# EAGLE board power electronics7 (EAGLE 9.2.2)
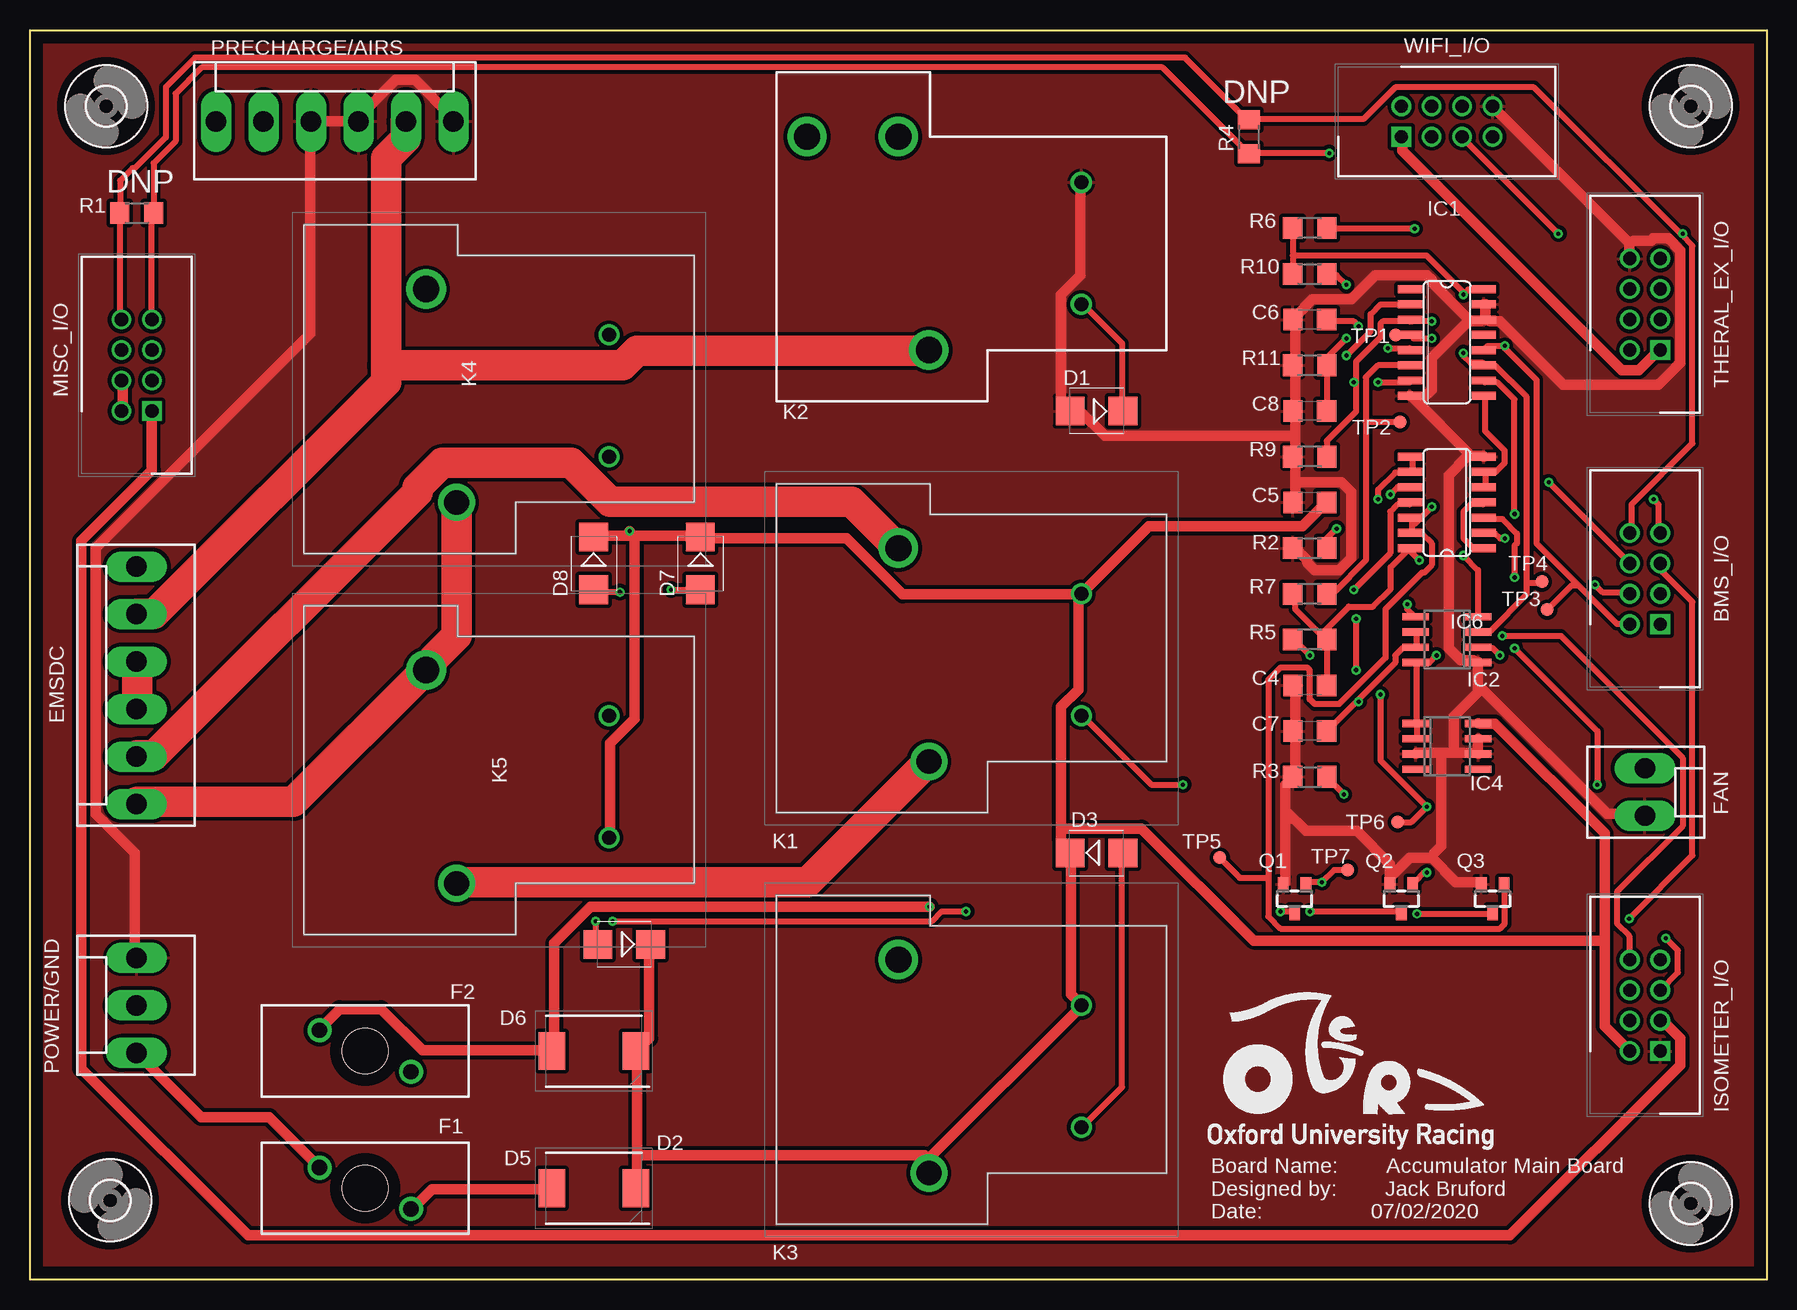
[diagram p0: board, top side]
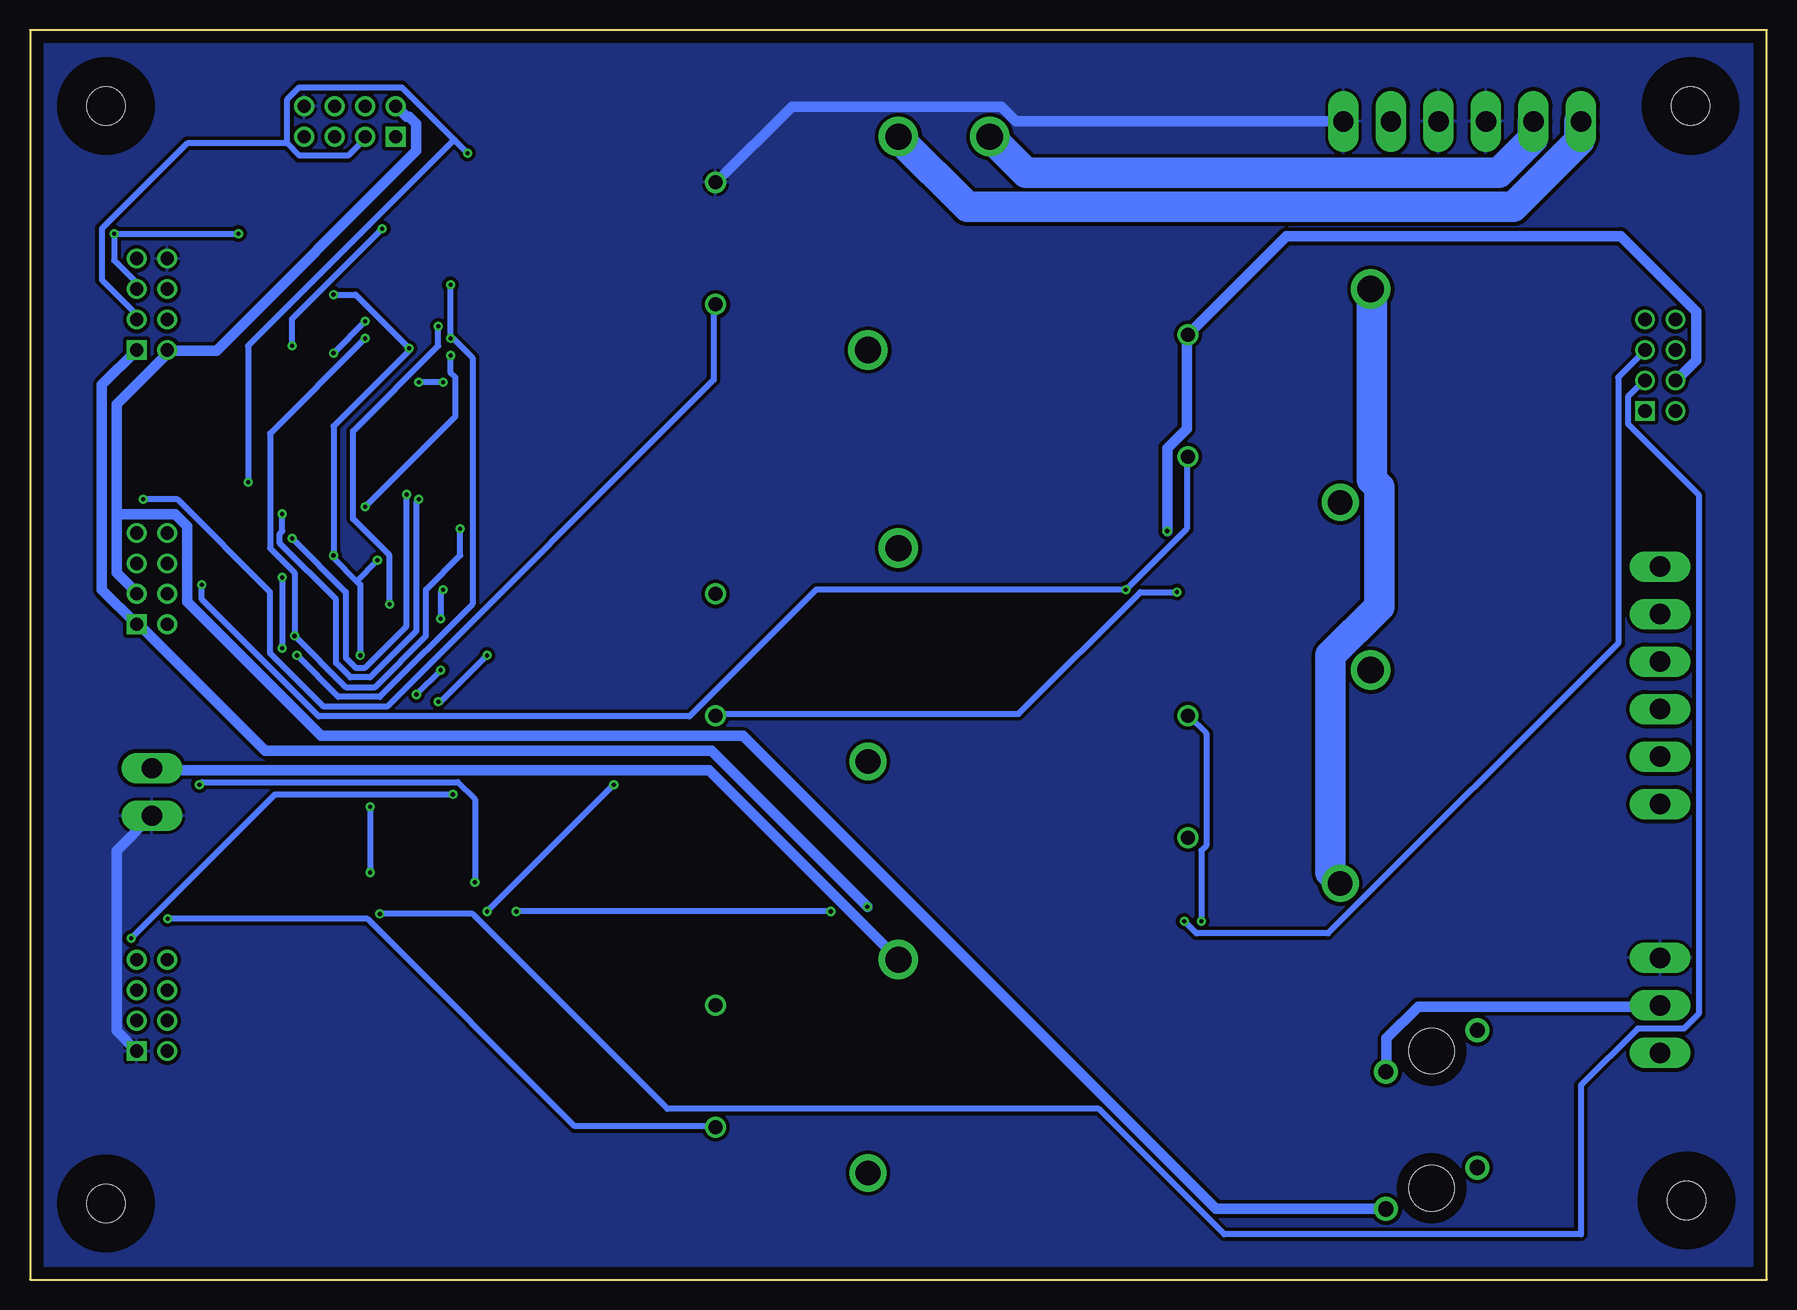
[diagram p1: board, bottom side, seen from below]

Size 144.78 x 104.14 mm. Coordinates in mm from the lower left corner, seen from the top.
Outline: 0,0 0,104.14 144.78,104.14 144.78,0 0,0
Copper layers (1*16): Top 0.035mm / dielectric 1.5mm / Bottom 0.035mm
Design rules "default *": minimum track width 6mil, minimum drill 0.35mm, track to track 12mil, track to pad 12mil, pad to pad 12mil, via to via 12mil, smd to smd 0mil, copper to edge 40mil, drill to drill 6mil, minimum pad ring 10mil, minimum via ring 8mil, stop-mask expansion 4mil, vias tented up to drill 0mil, thermal gap 10mil
Net classes: 0 default: width 0.508 mm; 1 GND: width 0.889 mm; 2 EMSDC: width 2.54 mm; 3 power: width 0.889 mm

## Footprints (pad centres in the part's own frame; a part is rotated, then mirrored left to right if it is on the bottom)
HDRV8W64P254_2X4_1778X895X915P = drill 1.1 pad 1.65 square: 1 0,0 | drill 1.1 pad 1.65: 2 0,2.54; 3 2.54,0; 4 2.54,2.54; 5 5.08,0; 6 5.08,2.54; 7 7.62,0; 8 7.62,2.54
C1206 = smd 1.6 x 1.8: 1 -1.4,0; 2 1.4,0
SMB = smd 2.4 x 2.4: A 2.2,0; C -2.2,0
DIOM7959X262N = smd 2.2 x 3.15: 1 -3.5,0; 2 3.5,0
KK-156-6 = drill 1.7 pad 2.184 long: 1 -9.9,0; 2 -5.94,0; 3 -1.98,0; 4 1.98,0; 5 5.94,0; 6 9.9,0
01530008 = drill 1.27 pad 2: 1 1.727,3.81; 2 -1.727,-3.81 | hole 3.785: 0,0
KK-156-2 = drill 1.7 pad 2.184 long: 1 -1.98,0; 2 1.98,0
3,2 = hole 3.2: 0,0
SO16 = smd 0.66 x 2.032: 1 -4.445,-3.073; 2 -3.175,-3.073; 3 -1.905,-3.073; 4 -0.635,-3.073; 5 0.635,-3.073; 6 1.905,-3.073; 7 3.175,-3.073; 8 4.445,-3.073; 9 4.445,3.073; 10 3.175,3.073; 11 1.905,3.073; 12 0.635,3.073; 13 -0.635,3.073; 14 -1.905,3.073; 15 -3.175,3.073; 16 -4.445,3.073
SO08 = smd 0.6 x 2.2: 1 -1.905,-2.6; 2 -0.635,-2.6; 3 0.635,-2.6; 4 1.905,-2.6; 5 1.905,2.6; 6 0.635,2.6; 7 -0.635,2.6; 8 -1.905,2.6
SOIC8 = smd 0.6 x 2.2: 1 -1.905,-2.6; 2 -0.635,-2.6; 3 0.635,-2.6; 4 1.905,-2.6; 5 1.905,2.6; 6 0.635,2.6; 7 -0.635,2.6; 8 -1.905,2.6
SO14 = smd 0.66 x 2.032: 1 -3.81,-3.073; 2 -2.54,-3.073; 3 -1.27,-3.073; 4 0,-3.073; 5 1.27,-3.073; 6 2.54,-3.073; 7 3.81,-3.073; 8 3.81,3.073; 9 2.54,3.073; 10 1.27,3.073; 11 0,3.073; 12 -1.27,3.073; 13 -2.54,3.073; 14 -3.81,3.073
T9AS1D1248T9A = drill 1.17 pad 1.755: 1 0,0; 2 -10.16,0 | drill 2.06 pad 3.09: 3 -13.97,12.7 | drill 2.19 pad 3.3: 4 3.81,15.24
T9AS1D12 = drill 2.19 pad 3.29: 1 -8.89,12.7; 2 8.89,15.24; 3 8.89,22.86 | drill 1.17 pad 1.77: 4 -5.08,0; 5 5.08,0
KK-156-3 = drill 1.7 pad 2.184 long: 1 -3.96,0; 2 0,0; 3 3.96,0
SOT23 = smd 0.9 x 1.2: 1 -0.95,-1.2; 2 0.95,-1.2; 3 0,1.2
R1206 = smd 1.6 x 1.803: 1 -1.422,0; 2 1.422,0
TP11R = smd 1.1 x 1.1: TP 0,0
TP17R = smd 1.7 x 1.7: TP 0,0

## Placement (x,y rotation side)
BMS_I/O  T821108A1S100CEU  [HDRV8W64P254_2X4_1778X895X915P]  135.89,54.61 90 top
C4  3.3uF  [C1206]  106.68,49.53 180 top
C5  1uF  [C1206]  106.68,64.77 180 top
C6  0.1uF  [C1206]  106.68,80.01 180 top
C7  220uF  [C1206]  106.68,45.72 180 top
C8  50uF  [C1206]  106.68,72.39 180 top
D1  ES2D  [SMB]  88.9,72.39 180 top
D2  VS-30BQ100-M3_9AT  [DIOM7959X262N]  46.99,19.05 180 top
D3  ES2D  [SMB]  88.9,35.56 0 top
D5  VS-30BQ100-M3_9AT  [DIOM7959X262N]  46.99,7.62 180 top
D6  ES2D  [SMB]  49.53,27.94 180 top
D7  ES2D  [SMB]  55.88,59.69 270 top
D8  ES2D  [SMB]  46.99,59.69 270 top
EMSDC  [KK-156-6]  8.89,49.53 90 top
F1  01530008Z  [01530008]  27.94,7.62 270 top
F2  01530008Z  [01530008]  27.94,19.05 90 top
FAN  [KK-156-2]  134.62,40.64 270 top
H1  MOUNT-HOLE3.2  [3,2]  138.43,6.35 0 top
H2  MOUNT-HOLE3.2  [3,2]  138.43,97.79 0 top
H3  MOUNT-HOLE3.2  [3,2]  6.68,6.6 90 top
H4  MOUNT-HOLE3.2  [3,2]  6.35,97.79 0 top
IC1  4043D  [SO16]  118.11,78.11 270 top
IC2  SE555D  [SO08]  118.11,53.34 90 top
IC4  [SOIC8]  118.11,44.45 270 top
IC6  4011D  [SO14]  118.11,64.77 90 top
ISOMETER_I/O  T821108A1S100CEU  [HDRV8W64P254_2X4_1778X895X915P]  135.89,19.05 90 top
K1  T9AS1D12-48=T9A  [T9AS1D1248T9A]  87.63,57.15 90 top
K2  T9AS5D12-12=T9A  [T9AS1D12]  87.63,86.36 90 top
K3  T9AS1D12-48=T9A  [T9AS1D1248T9A]  87.63,22.86 90 top
K4  T9AS1D12-48=T9A  [T9AS1D1248T9A]  48.26,78.74 90 top
K5  T9AS1D12-48=T9A  [T9AS1D1248T9A]  48.26,46.99 90 top
MISC_I/O  T821108A1S100CEU  [HDRV8W64P254_2X4_1778X895X915P]  10.16,72.39 90 top
POWER/GND  [KK-156-3]  8.89,22.86 90 top
PRECHARGE/AIRS  [KK-156-6]  25.4,96.52 0 top
Q1  BSS138  [SOT23]  105.41,31.75 180 top
Q2  BSS138  [SOT23]  114.3,31.75 180 top
Q3  BSS138  [SOT23]  121.92,31.75 180 top
R1  120  [R1206]  8.89,88.9 180 top
R2  2.2K  [R1206]  106.68,60.96 180 top
R3  2.2K  [R1206]  106.68,41.91 180 top
R4  120  [R1206]  101.6,95.25 90 top
R5  10K  [R1206]  106.68,53.34 0 top
R6  2.2K  [R1206]  106.68,87.63 0 top
R7  2.2K  [R1206]  106.68,57.15 0 top
R9  10K  [R1206]  106.68,68.58 0 top
R10  50K  [R1206]  106.68,83.82 180 top
R11  500K  [R1206]  106.68,76.2 0 top
THERAL_EX_I/O  T821108A1S100CEU  [HDRV8W64P254_2X4_1778X895X915P]  135.89,77.47 90 top
TP1  TPSTP11R  [TP11R]  113.84,78.73 0 top
TP2  TPSTP11R  [TP11R]  114.2,71.46 0 top
TP3  TPSTP11R  [TP11R]  126.47,55.84 0 top
TP4  TPSTP11R  [TP11R]  126.03,58.18 0 top
TP5  TPSTP11R  [TP11R]  99.17,35.17 0 top
TP6  TPSTP11R  [TP11R]  114.01,38.14 0 top
TP7  TPSTP11R  [TP11R]  109.84,34.16 0 top
TP8  TPSTP17R  [TP17R]  1.3,-31.76 0 top  (outside the outline)
WIFI_I/O  T821108A1S100CEU  [HDRV8W64P254_2X4_1778X895X915P]  114.3,95.25 0 top

## Library data of the parts
BMS_I/O ISOMETER_I/O MISC_I/O THERAL_EX_I/O WIFI_I/O = SamacSys_Parts; DESCRIPTION: HEADER, VERTICAL, 2.54MM, 8WAY Amphenol T821 Series, 2.54mm Pitch 8 Way 2 Row Straight PCB Header, Solder Termination, 3A; HEIGHT: 9.15mm; MANUFACTURER_NAME: Amphenol; MANUFACTURER_PART_NUMBER: T821108A1S100CEU; RS_PART_NUMBER: 8323569; RS_PRICE-STOCK: http://uk.rs-online.com/web/p/products/8323569
C4-C8 = rcl; SPICEPREFIX: C
D1 D3 D6-D8 = diode
D2 D5 = SamacSys_Parts; DESCRIPTION: Vishay VS-30BQ100-M3/9AT SMT Schottky Diode, 100V 3A, 2-Pin DO-214AB; HEIGHT: 2.62mm; MANUFACTURER_NAME: Vishay; MANUFACTURER_PART_NUMBER: VS-30BQ100-M3/9AT; MOUSER_PART_NUMBER: 78-VS-30BQ100-M39AT; MOUSER_PRICE-STOCK: https://www.mouser.com/Search/Refine.aspx?Keyword=78-VS-30BQ100-M39AT
EMSDC FAN POWER/GND PRECHARGE/AIRS = con-molex; MF: MOLEX; OC_FARNELL: unknown; OC_NEWARK: unknown
F1 F2 = SamacSys_Parts; ALLIED_NUMBER: 70184304; DESCRIPTION: Mini fuseholder,15A 32V Littelfuse 15A PCB Mount Fuse Holder Automotive Fuse, 32 V; HEIGHT: mm; MANUFACTURER_NAME: LITTELFUSE; MANUFACTURER_PART_NUMBER: 01530008Z; RS_PART_NUMBER: 3607317; RS_PRICE-STOCK: https://uk.rs-online.com/web/p/products/3607317
H1-H4 = holes
IC1 IC6 = 40xx
IC2 = linear
IC4 = linear-technology; MPN: LT1129CS8-5#PBF; OC_FARNELL: 1273576; OC_NEWARK: 57M2078
K1 K3-K5 = SamacSys_Parts; DESCRIPTION: SPST-NO PCB Mount Non-Latching Relay Through Hole, 48V dc; HEIGHT: 20.4mm; MANUFACTURER_NAME: TE Connectivity; MANUFACTURER_PART_NUMBER: T9AS1D12-48=T9A; RS_PART_NUMBER: 6802534P; RS_PRICE-STOCK: http://uk.rs-online.com/web/p/products/6802534P
K2 = SamacSys_Parts; ALLIED_NUMBER: R1111589; DESCRIPTION: PCB Relay SPDT 30A 12Vdc,thru hole SPDT PCB Mount Non-Latching Relay Through Hole, 12V dc; HEIGHT: mm; MANUFACTURER_NAME: TE Connectivity; MANUFACTURER_PART_NUMBER: T9AS5D12-12=T9A; RS_PART_NUMBER: 6802528; RS_PRICE-STOCK: https://uk.rs-online.com/web/p/products/6802528
Q1-Q3 = m-pad-2.1
R1-R7 R9-R11 = rcl; SPICEPREFIX: R
TP1-TP8 = testpad

## Nets
+3V3: C4.1 IC1.5 IC1.16 IC2.4 IC2.8 IC4.1 IC4.2 IC6.14 R5.2 R6.1 R7.1 R10.2
+12V [power]: C5.1 D2.1 D3.C D5.1 D6.C D7.C D8.C IC4.8 ISOMETER_I/O.2 K1.1 K3.1 K3.3 K4.1 K5.2 MISC_I/O.2 MISC_I/O.4
AMS_COIL_OUT: D8.A K1.2 Q2.3
AMS_LED-: MISC_I/O.5 Q1.3
CAN2_H: BMS_I/O.6 MISC_I/O.7 R1.1 R4.1 THERAL_EX_I/O.3 WIFI_I/O.3
CAN2_L: BMS_I/O.8 MISC_I/O.8 R1.2 R4.2 THERAL_EX_I/O.5 WIFI_I/O.5
CHARGE_POWER [power]: BMS_I/O.3 D5.2 F1.1 THERAL_EX_I/O.2 WIFI_I/O.2
CHARGE_SAFE: D6.A K5.1
CHASSIS_GND [GND]: ISOMETER_I/O.3 MISC_I/O.1
CHG_SAFE: BMS_I/O.2 IC1.12 R6.2 TP3.TP
DISCHARE_ENABLE: IC1.6 R7.2 TP2.TP
DISCHARGE_ENABLE: BMS_I/O.4 D7.A K4.2
EMSDC_IMD+ [EMSDC]: K1.3 K4.4 K5.3
FAN+ [power]: FAN.1 K3.4
FAN_ENABLE: BMS_I/O.5 D3.A K3.2
GND [GND]: C4.2 C5.2 C6.2 C7.2 C8.2 D1.A FAN.2 IC1.8 IC1.14 IC1.15 IC2.1 IC4.3 IC4.6 IC4.7 IC6.7 ISOMETER_I/O.1 K2.5 POWER/GND.3 PRECHARGE/AIRS.3 PRECHARGE/AIRS.4 PRECHARGE/AIRS.6 Q1.2 Q2.2 Q3.2 R2.2 R3.2 R9.1 R11.1 THERAL_EX_I/O.8 WIFI_I/O.8
HIGHEST_TEMP: THERAL_EX_I/O.4
IMD_LED-: MISC_I/O.3 Q3.3
LOWEST_TEMP: THERAL_EX_I/O.6
M_HS: ISOMETER_I/O.5 R3.1
N$1 [EMSDC]: EMSDC.1 K4.3 K5.4
N$2 [power]: F2.2 POWER/GND.2
N$3 [EMSDC]: K2.2 PRECHARGE/AIRS.1
N$4 [power]: F1.2 POWER/GND.1
N$8: IC1.2 IC6.12 IC6.13 Q3.1 TP5.TP
N$10: IC1.9 IC6.5 IC6.6
N$11 [EMSDC]: EMSDC.5 K2.1 PRECHARGE/AIRS.5
N$12 [EMSDC]: K2.3 PRECHARGE/AIRS.2
N$13: IC1.10 IC6.8 IC6.9
N$14: IC6.1 IC6.4
N$15 [EMSDC]: EMSDC.2 K1.4
N$17: C7.1 IC2.6 IC2.7 R5.1
N$19 [EMSDC]: EMSDC.3 EMSDC.4
N$20: IC6.2 IC6.10
N$21: IC6.3 Q1.1 TP7.TP
N$28: C8.1 IC2.2 R10.1 R11.2
N$32: C6.1 IC2.5
N$37: IC6.11 Q2.1 TP6.TP
OK_HS: IC1.4 ISOMETER_I/O.8 R2.1 TP1.TP
PRECHARGE_SELECT: BMS_I/O.7 D1.C K2.4
READY_POWER [power]: BMS_I/O.1 D2.2 F2.1 THERAL_EX_I/O.1 WIFI_I/O.1
STARTUP_RESET: IC1.3 IC1.7 IC1.11 IC2.3 R9.2 TP4.TP

## Tracks (layer width: path | path; a pad name or v marks a point on that pad's centre or on a via)
+3V3  (via drill 0.35)
  Top 0.508: C4.1 108.1,49.58 108.1,53.24 R5.2 | R7.1 105.46,57.1 105.46,55.88 107.9,53.44 R5.2 | R5.2 107.7,53.85 109.93,56.08 111.96,56.08 113.43,57.55 113.43,59.38 115.01,60.96 IC6.14 115.01,60.76 v115.82,59.94 | IC4.2 115.62,45.11 115.62,46.33 IC4.1 115.62,46.53 115.62,51.41 IC2.8 115.82,51.41 116.64,51.41 v117.25,52.02 | 105.26,85.34 105.26,87.58 R6.1 | 105.26,85.34 105.26,83.92 R10.2 | v113.18,77.62 115.01,77.62 IC1.5 | IC1.16 121.11,82.5 119.89,82.5 v119.48,82.09 119.48,82.3 116.43,85.34 105.26,85.34 | v119.48,60.35 120.7,59.13 120.7,55.27 IC2.4
  Bottom 0.508: v119.48,82.09 117.65,82.09 v113.18,77.62 113.18,77.42 119.48,71.12 v119.48,60.35 119.48,60.15 117.55,58.22 | v117.25,52.02 117.25,57.91 117.55,58.22 | 117.55,58.22 v115.82,59.94
+12V  (via drill 0.35)
  Top 0.889: MISC_I/O.2 7.72,72.54 7.72,74.78 MISC_I/O.4 | 50.39,61.98 55.88,61.98 D7.C 56.29,61.77 68.07,61.77 72.75,57.1 86.97,57.1 K1.1 | 50.39,61.98 49.99,61.98 | 49.99,61.98 47.14,61.98 D8.C | 50.39,61.98 50.39,46.74 48.36,44.7 48.36,36.98 K5.2 | v49.99,62.38 49.99,61.98 | 131.27,28.25 131.27,21.13 ISOMETER_I/O.2 | 131.27,28.25 131.27,37.19 122.12,46.33 120.9,46.33 IC4.8 | K1.1 93.27,62.79 106.07,62.79 107.9,64.62 C5.1 | D6.C 51.61,27.84 51.61,20.12 50.6,19.1 D2.1 50.6,18.69 50.6,10.36 | 50.6,10.36 50.6,7.72 D5.1 | 50.6,10.36 74.57,10.36 K3.3 74.98,8.94 74.98,10.16 87.38,22.55 K3.1 87.58,22.96 86.77,23.77 86.77,35.56 D3.C 86.56,35.97 85.95,36.58 85.95,37.59 | 85.95,37.59 85.95,47.75 87.38,49.17 87.38,56.9 K1.1 | 131.27,28.25 102.01,28.25 92.66,37.59 85.95,37.59
  Bottom 0.889: v49.99,62.38 49.99,69.29 48.36,70.92 48.36,78.64 K4.1 40.03,86.97 12.19,86.97 5.89,80.67 5.89,76.61 7.52,74.98 MISC_I/O.4
AMS_COIL_OUT  (via drill 0.35)
  Top 0.508: v106.68,30.68 114.2,30.68 Q2.3 | v96.11,41.25 93.47,41.25 87.78,46.94 K1.2 | v49.17,57.3 47.14,57.3 D8.A
  Bottom 0.508: v96.11,41.25 v106.68,30.68 | v49.17,57.3 52.22,57.3 62.38,47.14 87.58,47.14 K1.2
AMS_LED-  (via drill 0.35)
  Top 0.508: v104.24,30.68 105.26,30.68 Q1.3 | v78.03,30.68 76,30.68 75.18,29.87 v48.56,29.87
  Bottom 0.508: v78.03,30.68 v104.24,30.68 | v48.56,29.87 47.55,28.85 36.58,28.85 12.39,53.03 12.39,75.18 10.16,77.42 MISC_I/O.5
CAN2_H  (via drill 0.35)
  Top 0.508: MISC_I/O.7 10.16,88.8 R1.1 10.31,93.04 12.13,94.86 12.13,98.84 14.31,101.02 94.41,101.02 R4.1 101.6,93.88 v108.31,93.88 | v126.59,66.45 BMS_I/O.6
  Bottom 0.508: 109.42,95 113.79,99.36 122.33,99.36 123.34,98.35 123.34,94.69 | 109.42,95 v108.31,93.88 | 123.34,94.69 122.33,93.67 118.26,93.67 116.84,95.1 WIFI_I/O.3 | v126.59,66.45 126.59,77.83 109.42,95 | 123.34,94.69 131.67,94.69 138.79,87.58 138.79,83.31 135.94,80.47 135.94,80.06 THERAL_EX_I/O.3
CAN2_L  (via drill 0.35)
  Top 0.508: 7.52,88.8 7.52,80.06 MISC_I/O.8 | 7.52,88.8 R1.2 | 137.67,87.07 138.58,86.16 138.58,69.7 133.5,64.62 133.5,62.38 BMS_I/O.8 | 137.67,87.07 125.37,99.36 113.79,99.36 111.15,96.72 101.6,96.72 R4.2 101.4,96.72 96.29,101.83 13.76,101.83 11.32,99.38 11.32,95.19 8.74,92.62 8.55,92.62 7.52,91.59 7.52,88.8 | v137.77,87.17 137.67,87.07 | v127.41,87.17 119.48,95.1 WIFI_I/O.5
  Bottom 0.508: THERAL_EX_I/O.5 135.94,82.7 135.94,83.11 137.77,84.94 v137.77,87.17 v127.41,87.17
CHARGE_POWER
  Top 0.889: D5.2 43.48,7.52 33.53,7.52 31.9,5.89 F1.1
  Bottom 0.889: 137.57,63.8 137.57,72.95 133.5,77.01 133.5,77.42 THERAL_EX_I/O.2 132.89,77.42 129.24,77.42 112.57,94.08 112.57,96.32 113.18,96.93 113.39,96.93 114.2,97.74 WIFI_I/O.2 | 137.57,63.8 137.57,58.93 135.94,57.3 BMS_I/O.3 | F1.1 45.92,5.89 85.34,45.31 120.5,45.31 131.67,56.49 131.67,62.79 132.69,63.8 137.57,63.8
CHARGE_SAFE  (via drill 0.35)
  Top 0.508: v47.14,29.87 47.14,28.04 D6.A
  Bottom 0.508: v47.14,29.87 47.14,35.76 46.74,36.17 46.74,45.52 48.16,46.94 K5.1
CHASSIS_GND
  Top 0.889: MISC_I/O.1 10.16,67.46 4.27,61.57 4.27,17.59 18.17,3.68 123.37,3.68 137.57,17.88 137.57,20.12 135.94,21.74 ISOMETER_I/O.3
CHG_SAFE  (via drill 0.35)
  Top 0.508: v115.42,87.58 108.1,87.58 R6.2 | IC1.12 121.31,77.62 121.51,77.83 v122.94,77.83 122.94,77.62 125.58,74.98 125.58,61.37 129.08,57.87 | 129.08,57.87 132.28,54.66 133.3,54.66 BMS_I/O.2 | TP3.TP 128.5,57.87 129.08,57.87
  Bottom 0.508: v115.42,87.58 122.94,80.06 v122.94,77.83
DISCHARE_ENABLE
  Top 0.508: 111.35,71.46 111.35,75.18 112.37,76.2 IC1.6 | 111.35,71.46 111.35,59.94 108.71,57.3 108.1,57.3 R7.2 | TP2.TP 111.35,71.46
DISCHARGE_ENABLE  (via drill 0.35)
  Top 0.508: v53.44,57.51 55.88,57.51 D7.A | v130.45,57.91 131.06,57.3 133.3,57.3 BMS_I/O.4
  Bottom 0.508: K4.2 48.36,68.48 48.36,62.59 v53.44,57.51 79.25,57.51 89.81,46.94 120.7,46.94 130.45,56.69 v130.45,57.91
EMSDC_IMD+
  Top 2.54: K5.3 35.56,33.12 64.82,33.12 74.78,43.08 K1.3
  Bottom 2.54: K4.4 32.92,82.5 32.92,66.65 32.31,66.04 32.31,56.08 36.37,52.02 36.37,33.93 35.56,33.12 K5.3
FAN+
  Bottom 0.889: K3.4 88.19,42.47 134.52,42.47 FAN.1
FAN_ENABLE  (via drill 0.35)
  Top 0.508: D3.A 91.03,35.56 91.03,16.05 87.78,12.8 K3.2 | v133.3,30.07 138.58,35.36 138.58,56.49 135.94,59.13 135.94,59.54 BMS_I/O.5
  Bottom 0.508: v133.3,30.07 116.64,30.07 99.36,12.8 87.78,12.8 K3.2
GND
  Top 0.889: POWER/GND.3 8.74,26.82 8.74,35.56 5.49,38.81 5.49,60.96 23.37,78.84 23.37,96.52 PRECHARGE/AIRS.3 PRECHARGE/AIRS.4 27.43,96.93 30.48,99.97 32.11,99.97 35.15,96.93 35.15,96.52 PRECHARGE/AIRS.6 | 120.7,43.89 118.67,43.89 | 118.67,43.89 117.65,43.89 | 117.65,43.89 115.62,43.89 IC4.3 | 120.7,43.89 IC4.6 | 120.7,43.89 120.7,44.91 IC4.7 | 120.7,49.17 120.7,48.97 118.67,46.94 118.67,43.89 | 120.7,49.17 120.7,51.41 IC2.1 120.29,51.61 119.28,51.61 118.26,52.63 118.26,67.06 119.69,68.48 120.09,68.68 | 104.65,39.09 104.65,41.25 105.26,41.86 R3.2 105.46,42.27 105.46,45.72 C7.2 105.46,46.13 105.46,49.38 C4.2 | 104.65,39.09 104.65,33.12 Q1.2 | 116.84,35.15 118.87,33.12 120.9,33.12 Q3.2 | 116.84,35.15 115.01,35.15 113.39,33.53 Q2.2 113.35,34.63 110.58,37.4 106.34,37.4 104.65,39.09 | 117.65,43.89 117.65,36.17 117.04,35.56 116.84,35.15 | FAN.2 134.52,38.81 131.47,38.81 121.11,49.17 120.7,49.17 | 133.3,86.36 133.3,85.14 THERAL_EX_I/O.8 | 133.3,86.36 121.92,97.74 WIFI_I/O.8 | IC1.14 121.31,80.06 121.31,81.28 IC1.15 | 120.09,68.68 121.11,68.68 IC6.7 | 120.09,68.68 115.21,73.56 IC1.8 116.03,73.36 116.84,74.17 116.84,76.81 119.89,79.86 | 119.89,79.86 120.9,79.86 IC1.14 | 105.46,66.45 105.46,68.48 R9.1 105.46,68.89 105.46,70.31 | 105.46,66.45 105.46,64.82 C5.2 | 105.46,70.31 105.46,72.34 C8.2 105.46,72.75 105.46,75.79 R11.1 105.46,76.2 105.46,79.86 C6.2 105.46,80.26 106.88,81.69 110.13,81.69 112.17,83.72 116.43,83.72 116.84,83.31 116.84,83.11 119.69,80.26 119.89,79.86 | 105.46,66.45 109.32,66.45 110.13,65.63 110.13,60.15 109.12,59.13 107.09,59.13 106.48,59.74 106.48,59.94 105.46,60.96 R2.2
  Top 0.889: 105.46,70.31 89.61,70.31 87.58,72.34 86.77,72.34 D1.A 86.56,72.75 85.95,73.36 85.95,82.09 87.58,83.72 87.58,91.44 K2.5 | 133.3,86.36 133.71,86.56 135.13,86.56 135.33,86.77 136.55,86.77 137.57,85.75 137.57,76.4 135.74,74.57 127.81,74.57 122.53,79.86 121.72,79.86 IC1.14
  Bottom 0.889: ISOMETER_I/O.1 137.57,20.73 137.57,35.76 134.72,38.61 FAN.2 | PRECHARGE/AIRS.6 62.59,96.52 63.8,97.74 81.28,97.74 87.58,91.44 K2.5
  pour Bottom: 0,104.14 144.78,104.14 144.78,0 0,0
  pour Top: 0,104.14 144.78,104.14 144.78,0 0,0
IMD_LED-  (via drill 0.35)
  Top 0.508: v115.62,30.48 121.92,30.48 Q3.3
  Bottom 0.508: v115.62,30.48 107.9,30.48 91.64,14.22 55.68,14.22 45.23,3.77 15.51,3.77 15.51,16.19 10.77,20.93 6.91,20.93 5.69,22.15 5.69,65.43 11.58,71.32 11.58,73.56 10.16,74.98 MISC_I/O.3
M_HS  (via drill 0.35)
  Top 0.508: v109.53,40.44 108.1,41.86 R3.1 | v136.35,28.45 137.36,27.43 137.36,25.6 ISOMETER_I/O.5
  Bottom 0.508: v109.53,40.44 124.36,40.44 v136.35,28.45
N$1
  Top 2.54: EMSDC.1 8.94,39.83 21.95,39.83 32.92,50.8 K5.4 33.73,51.82 35.56,53.65 K4.3
N$2
  Bottom 0.889: F2.2 31.7,17.48 31.7,20.12 29.06,22.76 8.94,22.76 POWER/GND.2
N$3
  Bottom 2.54: PRECHARGE/AIRS.1 15.65,96.52 15.65,94.89 21.13,89.41 66.65,89.41 72.34,95.1 K2.2
N$4
  Top 0.889: F1.2 19.94,13.54 14.25,13.54 POWER/GND.1
N$8  (via drill 0.35)
  Top 0.508: 103.23,33.49 103.23,49.99 104.24,51 106.48,51 106.68,50.8 106.68,48.36 107.09,47.95 109.12,47.95 112.98,51.82 112.98,55.88 116.03,58.93 116.23,58.93 116.84,59.54 116.84,61.37 116.03,62.18 115.21,62.18 IC6.13 115.21,62.38 115.21,62.99 | 103.23,33.49 103.23,30.28 104.24,29.26 122.53,29.26 122.94,29.67 122.94,32.92 Q3.1 | 115.21,62.99 115.21,63.4 IC6.12 | v109.73,77.01 111.76,79.05 111.76,80.46 112.58,81.28 IC1.2 | v116.84,64.41 115.42,62.99 115.21,62.99 | 103.23,33.49 100.85,33.49 TP5.TP
  Bottom 0.508: v109.73,77.01 109.73,75.59 109.32,75.18 109.32,71.93 v116.84,64.41
N$10
  Top 0.508: IC6.5 121.31,66.04 121.31,67.26 IC6.6 121.51,67.26 122.12,67.26 122.94,68.07 122.94,69.09 121.31,70.71 121.31,73.56 IC1.9
N$11
  Top 2.54: 29.67,76.2 29.67,93.47 31.29,95.1 31.29,96.52 PRECHARGE/AIRS.5 | 29.67,76.2 29.67,74.78 10.36,55.47 8.94,55.47 EMSDC.5 | 29.67,76.2 49.38,76.2 50.6,77.42 74.78,77.42 K2.1
N$12
  Bottom 2.54: K2.3 61.77,92.25 22.35,92.25 19.51,95.1 19.51,96.52 PRECHARGE/AIRS.2
N$13  (via drill 0.35)
  Top 0.508: IC6.8 115.21,68.48 115.21,67.46 IC6.9 114.81,67.26 113.79,67.26 112.37,65.84 v112.37,65.02 | v123.75,63.8 123.75,73.36 122.33,74.78 121.31,74.78 IC1.10
  Bottom 0.508: v123.75,63.8 123.75,62.38 123.95,62.18 123.95,61.37 119.28,56.69 119.28,51.41 118.06,50.19 116.43,50.19 112.57,54.05 112.57,64.82 v112.37,65.02
N$14
  Top 0.508: IC6.1 120.29,60.96 119.48,61.77 119.48,64.01 120.09,64.62 121.11,64.62 IC6.4
N$15
  Top 2.54: EMSDC.2 8.94,43.69 10.36,43.69 32.31,65.63 32.31,66.04 34.34,68.07 45.11,68.07 48.36,64.82 68.48,64.82 72.34,60.96 K1.4
N$17  (via drill 0.35)
  Top 0.508: 110.64,48.26 113.79,51.41 113.79,52.02 114.4,52.63 115.42,52.63 IC2.7 115.62,52.83 115.62,53.85 IC2.6 | 110.64,48.26 108.1,45.72 C7.1 | v106.68,52.02 105.46,53.24 R5.1 | v110.74,48.16 110.64,48.26
  Bottom 0.508: v106.68,52.02 110.54,48.16 v110.74,48.16
N$19
  Top 2.54: EMSDC.3 8.94,47.75 8.94,51.41 EMSDC.4
N$20  (via drill 0.35)
  Top 0.508: IC6.10 114,66.04 v113.39,65.43 | v122.94,61.77 122.53,61.77 122.12,62.18 121.31,62.18 IC6.2
  Bottom 0.508: v113.39,65.43 113.39,54.46 116.84,51 117.65,51 118.47,51.82 118.47,57.3 v122.94,61.77
N$21  (via drill 0.35)
  Top 0.508: v130.66,41.25 130.66,45.72 v123.75,52.63 | v123.75,58.52 123.75,61.16 123.95,61.37 123.95,62.18 122.73,63.4 121.31,63.4 IC6.3 | Q1.1 106.48,33.12 v107.7,33.12 108.71,34.14 109.82,34.14 TP7.TP
  Bottom 0.508: v107.7,33.12 107.7,40.03 109.12,41.45 130.45,41.45 v130.66,41.25 | v123.75,58.52 v123.75,52.63
N$28  (via drill 0.35)
  Top 0.508: R11.2 108.1,72.54 C8.1 | R11.2 | v109.73,82.91 108.92,83.72 108.1,83.72 R10.1 | v109.73,78.44 108.1,76.81 108.1,76.4 R11.2 | v122.53,52.02 121.92,52.63 120.9,52.63 IC2.2
  Bottom 0.508: v109.73,82.91 v109.73,78.44 109.53,78.44 107.9,76.81 107.9,56.29 115.62,48.56 119.08,48.56 v122.53,52.02
N$32  (via drill 0.35)
  Top 0.508: v110.74,79.45 110.34,79.86 108.1,79.86 C6.1 | v114.81,56.29 114.81,55.88 115.42,55.27 IC2.5
  Bottom 0.508: v110.74,79.45 110.74,77.83 117.86,70.71 117.86,63.4 114.81,60.35 v114.81,56.29
N$37  (via drill 0.35)
  Top 0.508: v116.43,33.93 116.23,33.93 115.42,33.12 Q2.1 | v112.57,48.77 112.57,43.28 v116.43,39.42 115.15,38.14 TP6.TP | v110.54,55.07 v110.54,50.8 | v110.34,57.51 113.39,60.55 113.39,64.01 114,64.62 115.01,64.62 IC6.11
  Bottom 0.508: v116.43,39.42 v116.43,33.93 | v110.54,50.8 v112.57,48.77 | v110.54,55.07 110.54,57.3 v110.34,57.51
OK_HS  (via drill 0.35)
  Top 0.508: R2.1 108.1,61.77 v108.92,62.59 | R2.1 | v122.73,53.65 127.61,53.65 137.77,43.48 137.77,37.8 132.28,32.31 132.28,29.67 133.3,28.65 133.3,26.82 ISOMETER_I/O.8 | TP1.TP IC1.4 115.34,78.44 v116.84,78.44
  Bottom 0.508: v108.92,62.59 108.92,60.35 111.76,57.51 111.76,53.65 116.03,49.38 118.47,49.38 v122.73,53.65 122.73,58.93 124.77,60.96 124.77,70.51 v116.84,78.44
PRECHARGE_SELECT  (via drill 0.35)
  Top 0.508: D1.C 91.03,72.54 91.03,78.03 87.78,81.28 K2.4 | v135.33,65.02 135.74,64.62 135.74,62.38 BMS_I/O.7
  Bottom 0.508: v135.33,65.02 132.49,65.02 124.77,57.3 124.77,52.22 120.29,47.75 115.01,47.75 87.78,74.98 87.78,81.28 K2.4
READY_POWER  (via drill 0.35)
  Top 0.889: F2.1 24.18,20.93 25.81,22.55 29.26,22.55 32.72,19.1 43.48,19.1 D2.2 43.69,19.51 43.69,28.04 46.74,31.09 v74.98,31.09 | WIFI_I/O.1 114.4,95.1 114.4,94.08 132.69,75.79 134.11,75.79 135.74,77.42 THERAL_EX_I/O.1
  Bottom 0.889: THERAL_EX_I/O.1 138.79,74.57 138.79,57.51 BMS_I/O.1 135.53,54.46 125.17,44.09 87.99,44.09 v74.98,31.09
STARTUP_RESET  (via drill 0.35)
  Top 0.508: 110.54,74.78 110.54,72.34 108.1,69.9 108.1,68.68 R9.2 | v112.37,74.78 115.01,74.78 IC1.7 | v110.34,74.78 110.54,74.78 | 124.77,58.05 124.77,57.1 121.72,54.05 120.9,54.05 IC2.3 | 124.77,58.05 124.77,73.56 122.12,76.2 IC1.11 121.11,76.4 120.09,76.4 119.48,77.01 v119.48,77.22 | v116.84,79.86 115.21,79.86 IC1.3 115.01,79.86 112.76,79.86 112.57,79.67 112.57,78.53 110.54,76.5 110.54,74.78 | TP4.TP 125.9,58.05 124.77,58.05
  Bottom 0.508: v110.34,74.78 v112.37,74.78 | v119.48,77.22 v116.84,79.86

## Text on the board
tPlace: DNP | DNP | Board Name: Accumulator Main Board / Designed by: Jack Bruford / Date: 07/02/2020